# EAGLE board FlasherHighpower (EAGLE 9.5.2)
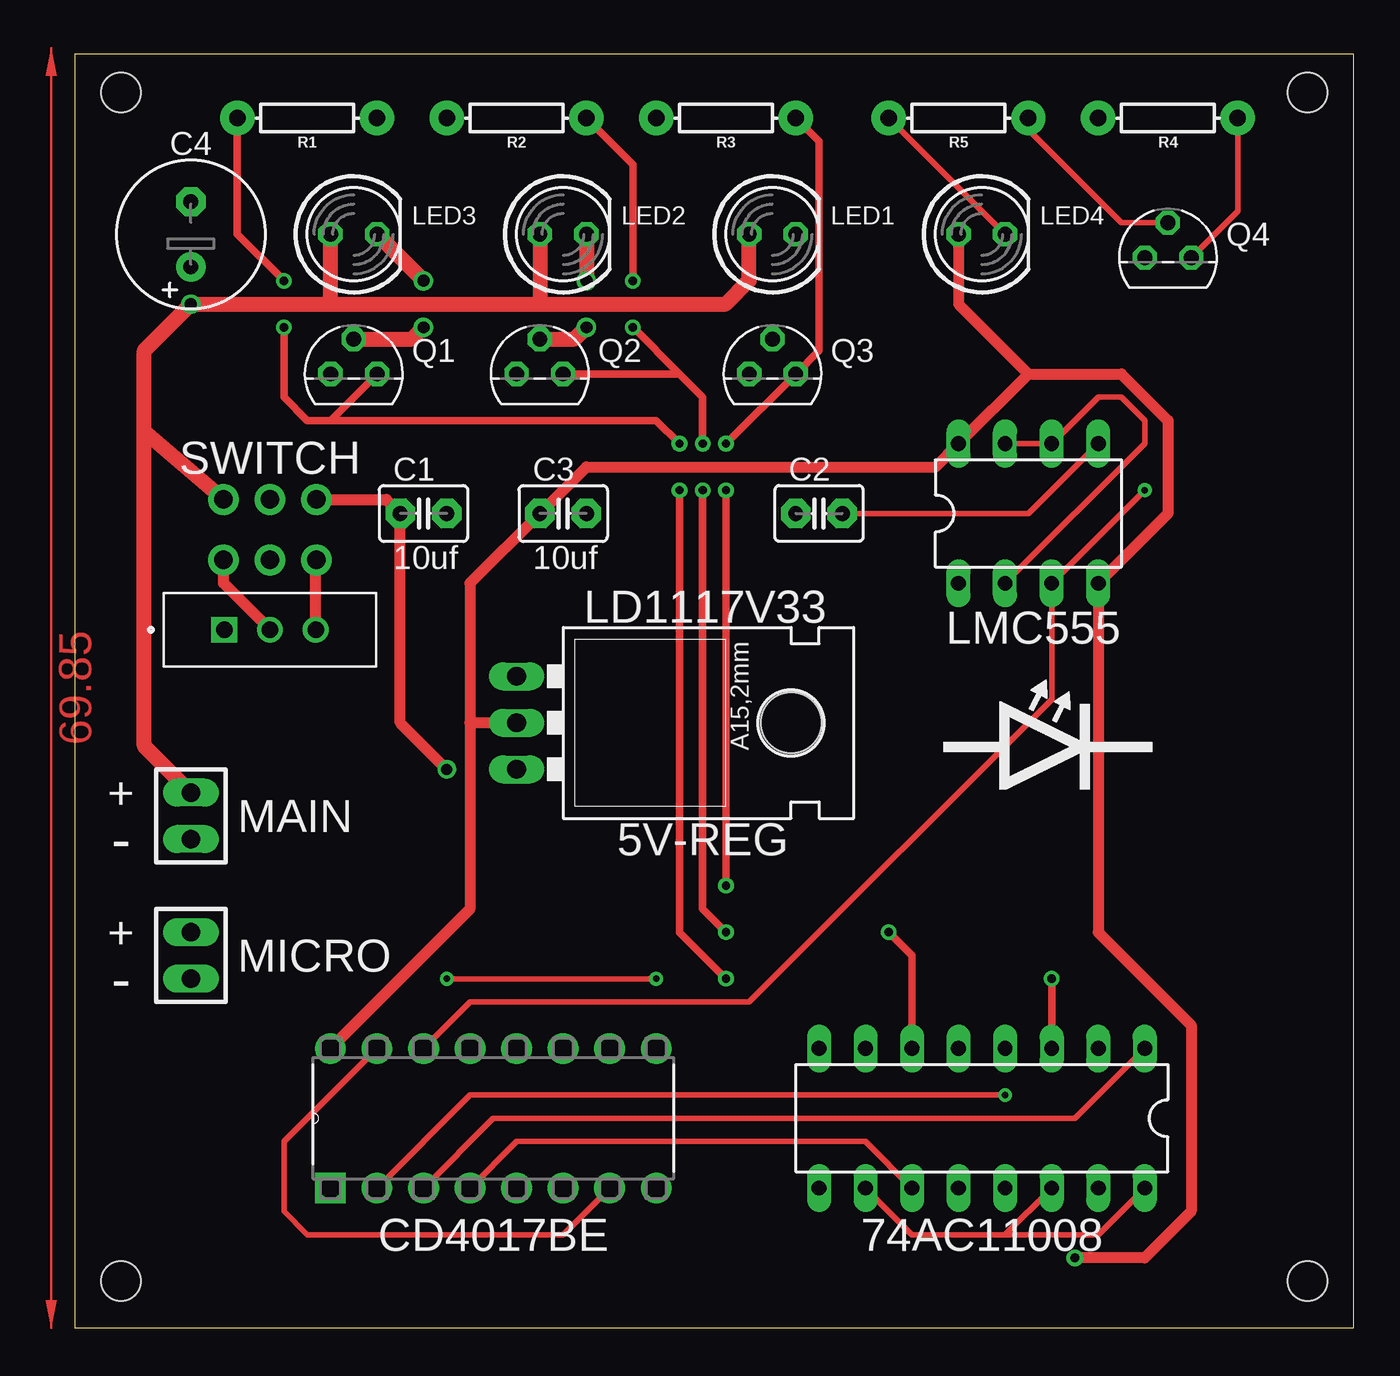
[diagram p0: board, top side]
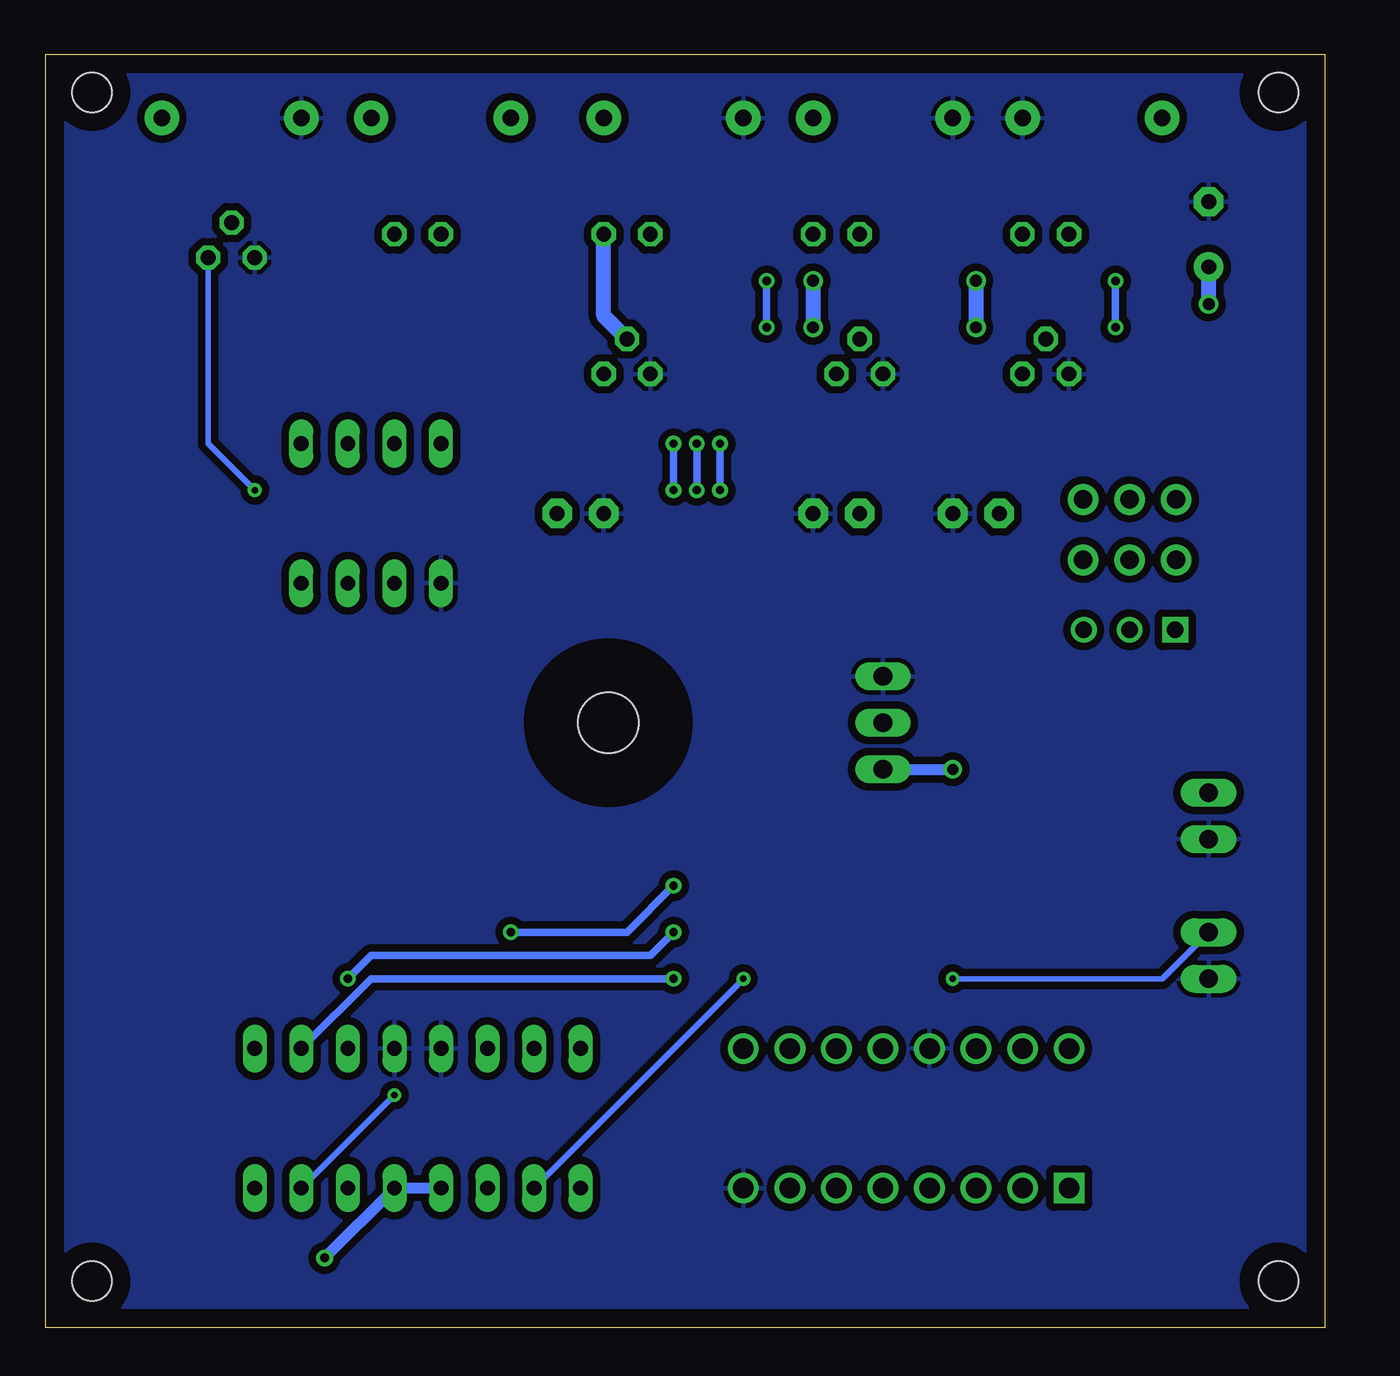
[diagram p1: board, bottom side, seen from below]

Size 69.83 x 69.52 mm. Coordinates in mm from the lower left corner, seen from the top.
Outline: 0,0 69.83,0 69.83,69.52 0,69.52 0,0
Copper layers (1*16): Top 0.035mm / dielectric 1.5mm / Bottom 0.035mm
Design rules "default": minimum track width 6mil, minimum drill 0.35mm, track to track 6mil, track to pad 6mil, pad to pad 6mil, via to via 6mil, smd to smd 6mil, copper to edge 40mil, drill to drill 6mil, minimum pad ring 10mil, minimum via ring 8mil, stop-mask expansion 4mil, vias tented up to drill 0mil, thermal gap 10mil
Holes 2.16 mm at 2.54,67.44 2.54,2.54 67.31,2.54 67.31,67.44

## Footprints (pad centres in the part's own frame; a part is rotated, then mirrored left to right if it is on the bottom)
LD1117V33 = drill 1.016 long: GND -2.54,-8.89; IN 2.54,-8.89; OUT 0,-8.89 | hole 3.302: 0,6.096
C2.5-3 = drill 0.813 pad 1.6 octagon: 1 -1.27,0; 2 1.27,0
E3,5-8 = drill 0.813 pad 1.6: + -1.778,0 | drill 0.813 pad 1.6 octagon: - 1.778,0
DIL16 = drill 0.813 long: 1 -8.89,-3.81; 2 -6.35,-3.81; 3 -3.81,-3.81; 4 -1.27,-3.81; 5 1.27,-3.81; 6 3.81,-3.81; 7 6.35,-3.81; 8 8.89,-3.81; 9 8.89,3.81; 10 6.35,3.81; 11 3.81,3.81; 12 1.27,3.81; 13 -1.27,3.81; 14 -3.81,3.81; 15 -6.35,3.81; 16 -8.89,3.81
LED5MM = drill 0.813 octagon: A -1.27,0; K 1.27,0
SIP-100-02-40Y = drill 1.016 long: 1 -1.27,0; 2 1.27,0
TO92 = drill 0.813 octagon: 1 1.27,0; 2 0,1.905; 3 -1.27,0
AXIAL-0.3 = drill 0.9 pad 1.88: P$1 -3.81,0; P$2 3.81,0
1X03-CLEANBIG = drill 1.016 pad 1.676: 1 -2.54,0; 2 0,0; 3 2.54,0
SW_MINI-SPDT-SW = drill 0.9 square: 1 -2.5,0 | drill 0.9: 2 0,0; 3 2.5,0
DIP254P762X508-16 = drill 1.118 square: 1 -7.62,17.78 | drill 1.118: 2 -7.62,15.24; 3 -7.62,12.7; 4 -7.62,10.16; 5 -7.62,7.62; 6 -7.62,5.08; 7 -7.62,2.54; 8 -7.62,0; 9 0,0; 10 0,2.54; 11 0,5.08; 12 0,7.62; 13 0,10.16; 14 0,12.7; 15 0,15.24; 16 0,17.78
8-DIP = drill 0.813 long: 1 -2.54,-3.81; 2 0,-3.81; 3 2.54,-3.81; 4 5.08,-3.81; 5 5.08,3.81; 6 2.54,3.81; 7 0,3.81; 8 -2.54,3.81

## Placement (x,y rotation side)
5V-REG  LD1117V33  [LD1117V33]  33.02,33.02 270 top
C1  10uf  [C2.5-3]  19.05,44.45 0 top
C2  10uf  [C2.5-3]  40.64,44.45 180 top
C3  10uf  [C2.5-3]  26.67,44.45 0 top
C4  [E3,5-8]  6.35,59.69 90 top
IC1  74AC11008  [DIL16]  49.53,11.43 180 top
LED1  [LED5MM]  38.1,59.69 0 top
LED2  [LED5MM]  26.67,59.69 0 top
LED3  [LED5MM]  15.24,59.69 0 top
LED4  [LED5MM]  49.53,59.69 0 top
MICRO-ENABLE  M-1X02-SIP-100-40Y  [SIP-100-02-40Y]  6.35,20.32 90 top
POWER-IN  M-1X02-SIP-100-40Y  [SIP-100-02-40Y]  6.35,27.94 90 top
Q1  BSS296  [TO92]  15.24,52.07 0 top
Q2  BSS296  [TO92]  25.4,52.07 0 top
Q3  BSS296  [TO92]  38.1,52.07 0 top
Q4  BSS296  [TO92]  59.69,58.42 0 top
R1  1K  [AXIAL-0.3]  12.7,66.04 0 top
R2  1K  [AXIAL-0.3]  24.13,66.04 180 top
R3  1K  [AXIAL-0.3]  35.56,66.04 180 top
R4  1K  [AXIAL-0.3]  59.69,66.04 180 top
R5  1K  [AXIAL-0.3]  48.26,66.04 180 top
REC-SWITCH  [1X03-CLEANBIG]  10.67,41.91 0 top
S1  MINI-SPDT-SW  [SW_MINI-SPDT-SW]  10.67,38.1 0 top
TO-SWITCH  [1X03-CLEANBIG]  10.67,45.21 0 top
U2  CD4017BE  [DIP254P762X508-16]  31.75,15.24 90 top
U$2  LMC555  [8-DIP]  50.8,44.45 0 top

## Library data of the parts
5V-REG = LD1117V33
C1-C3 = capacitor-wima
C4 = rcl; SPICEPREFIX: C
IC1 = 74ac-logic
LED1-LED4 = led; SPICEPREFIX: L
MICRO-ENABLE POWER-IN = con-headers-jp
Q1-Q4 = transistor-fet
R1-R5 = SparkFun-Resistors; PROD_ID: RES-09327
REC-SWITCH TO-SWITCH = adafruit
S1 = MINI-SPDT-SW; AVAILABILITY: Unavailable; DESCRIPTION: Slide Switches MINI SPDT SWITCH; MF: Gravitech; MP: MINI-SPDT-SW; PACKAGE: None; PRICE: None
U2 = CD4017BE; AVAILABILITY: Unavailable; DESCRIPTION: Counter IC Counter, Decade 1 Element 10 Bit Positive Edge 16-PDIP; MF: Texas; MP: CD4017BE; PACKAGE: DIP-16 Intersil; PRICE: None
U$2 = LMC555; AVAILABILITY: Unavailable; DESCRIPTION: 555 Type, Timer/Oscillator _Single_ IC 3MHz 8-SOIC; MF: Texas Instruments; MP: LMC-555; PACKAGE: SOIC-8 Texas Instruments; PRICE: None

## Nets
5V: 5V-REG.OUT C3.1 IC1.12 IC1.13 LED4.A U2.16 U$2.4 U$2.8
12V: C4.+ LED1.A LED2.A LED3.A POWER-IN.2 TO-SWITCH.1
+5V: 5V-REG.IN C1.1 TO-SWITCH.3
GND: 5V-REG.GND C1.2 C2.2 C3.2 C4.- IC1.4 IC1.5 MICRO-ENABLE.1 POWER-IN.1 Q1.3 Q2.3 Q3.3 Q4.3 R1.P$2 R2.P$2 R3.P$2 R4.P$2 U2.8 U2.13 U$2.1
MICRO_ENABLE: IC1.10 IC1.14 IC1.16 MICRO-ENABLE.2
N$1: LED1.K Q3.2
N$2: LED2.K Q2.2
N$3: Q4.1 R4.P$1 U2.14 U$2.3
N$4: LED3.K Q1.2
N$5: REC-SWITCH.3 S1.3
N$6: REC-SWITCH.1 S1.2
N$7: C2.1 U$2.5
N$8: Q4.2 R5.P$1
N$9: LED4.K R5.P$2
Q0: IC1.2 Q1.1 R1.P$1
Q0I: IC1.1 U2.3
Q1: IC1.3 Q2.1 R2.P$1
Q1I: IC1.15 U2.2
Q2: IC1.6 Q3.1 R3.P$1
Q2I: IC1.11 U2.4
RST: U2.7 U2.15
TTD: U$2.2 U$2.6 U$2.7

## Tracks (layer width: path | path; a pad name or v marks a point on that pad's centre or on a via)
5V  (via drill 0.5)
  Top 0.61: 21.59,33.02 21.59,40.64 C3.1 27.94,46.99 46.99,46.99 U$2.8 52.07,52.07 | 21.59,33.02 21.59,22.86 U2.16 | LED4.A 48.26,55.88 52.07,52.07 | 52.07,52.07 57.15,52.07 59.69,49.53 59.69,44.45 U$2.4 55.88,21.59 60.96,16.51 60.96,6.35 58.42,3.81 v54.61,3.81 | 5V-REG.OUT 21.59,33.02
  Bottom 0.61: IC1.12 IC1.13 v54.61,3.81
12V  (via drill 0.65)
  Top 0.813: POWER-IN.2 3.81,31.75 3.81,48.91 | 3.81,48.91 TO-SWITCH.1 | 3.81,48.91 3.81,53.34 v6.35,55.88 13.97,55.88 | 13.97,55.88 LED3.A | 13.97,55.88 25.4,55.88 | LED2.A 25.4,55.88 | 25.4,55.88 35.56,55.88 36.83,57.15 LED1.A
  Bottom 0.813: v6.35,55.88 C4.+
+5V  (via drill 0.6)
  Top 0.61: v20.32,30.48 17.78,33.02 C1.1 17.02,45.21 TO-SWITCH.3
  Bottom 0.61: 5V-REG.IN v20.32,30.48
GND
  pour Bottom (isolate 0.406): -0.06,69.6 -0.06,0 69.91,0 69.91,69.6
MICRO_ENABLE  (via drill 0.35)
  Top 0.305: v31.75,19.05 v20.32,19.05 | IC1.14 50.8,5.08 | 50.8,5.08 45.72,5.08 IC1.10 | 50.8,5.08 55.88,5.08 IC1.16
  Bottom 0.305: v20.32,19.05 8.89,19.05 MICRO-ENABLE.2 | v31.75,19.05 IC1.10
N$1
  Bottom 0.813: Q3.2 39.37,55.24 LED1.K
N$2  (via drill 0.65)
  Top 0.813: LED2.K v27.94,57.15 | Q2.2 27.3,53.98 v27.94,54.61
  Bottom 0.813: v27.94,57.15 v27.94,54.61
N$3  (via drill 0.35)
  Top 0.305: Q4.1 63.5,60.96 R4.P$1 | v58.42,45.72 U$2.3 53.34,34.29 36.83,17.78 21.59,17.78 U2.14
  Bottom 0.305: Q4.1 60.96,48.26 v58.42,45.72
N$4  (via drill 0.65)
  Top 0.813: Q1.2 18.41,53.98 v19.05,54.61 | LED3.K v19.05,57.15
  Bottom 0.813: v19.05,57.15 v19.05,54.61
N$5
  Top 0.61: S1.3 13.17,41.87 REC-SWITCH.3
N$6
  Top 0.61: S1.2 8.13,40.64 REC-SWITCH.1
N$7
  Top 0.305: U$2.5 52.07,44.45 C2.1
N$8
  Top 0.305: R5.P$1 52.07,65.41 57.15,60.33 Q4.2
N$9
  Top 0.305: LED4.K R5.P$2
Q0  (via drill 0.45)
  Top 0.406: v35.56,19.05 33.02,21.59 v33.02,45.72 | v33.02,48.26 31.75,49.53 13.97,49.53 | Q1.1 13.97,49.53 | 13.97,49.53 12.7,49.53 11.43,50.8 v11.43,54.61 | v11.43,57.15 8.89,59.69 R1.P$1
  Bottom 0.406: IC1.2 52.07,19.05 v35.56,19.05 | v33.02,48.26 v33.02,45.72 | v11.43,54.61 v11.43,57.15
Q0I
  Top 0.305: U2.3 22.86,11.43 54.61,11.43 IC1.1
Q1  (via drill 0.45)
  Top 0.406: v53.34,19.05 IC1.3 | v35.56,21.59 34.29,22.86 v34.29,45.72 | v34.29,48.26 34.29,50.8 33.02,52.07 | 33.02,52.07 Q2.1 | 33.02,52.07 v30.48,54.61 | v30.48,57.15 30.48,63.5 R2.P$1
  Bottom 0.406: v53.34,19.05 52.07,20.32 36.83,20.32 v35.56,21.59 | v34.29,45.72 v34.29,48.26 | v30.48,54.61 v30.48,57.15
Q1I  (via drill 0.35)
  Top 0.305: U2.2 21.59,12.7 v50.8,12.7
  Bottom 0.305: v50.8,12.7 IC1.15
Q2  (via drill 0.45)
  Top 0.406: IC1.6 45.72,20.32 v44.45,21.59 | v35.56,24.13 v35.56,45.72 | v35.56,48.26 Q3.1 40.64,53.34 40.64,64.77 R3.P$1
  Bottom 0.406: v35.56,24.13 38.1,21.59 v44.45,21.59 | v35.56,48.26 v35.56,45.72
Q2I
  Top 0.305: U2.4 24.13,10.16 43.18,10.16 IC1.11
RST
  Top 0.305: U2.7 26.67,5.08 12.7,5.08 11.43,6.35 11.43,10.16 U2.15
TTD
  Top 0.305: U$2.7 U$2.6 55.88,50.8 57.15,50.8 58.42,49.53 58.42,48.26 U$2.2
(copper drawn outside any net)
  shapes: Top area x2

## Text on the board
tPlace: C:/Users/jackc/Desktop/ledLogo.bmp | C:/Users/jackc/Desktop/ledLogo.bmp
tNames: SWITCH | + | MAIN | - | + | MICRO | -
200bmp: C:/Users/jackc/Desktop/ledLogo.bmp